# Altium PCB QSTL_LED_PCB.PcbDoc
Units mm, origin at the board's own origin, x right, y up, seen from the top; angles counter-clockwise.
Board outline 10 x 20.43 mm, 2 copper layers (Top Layer, Bottom Layer); 6 components, 3 nets, 14 pads, 132 vias.
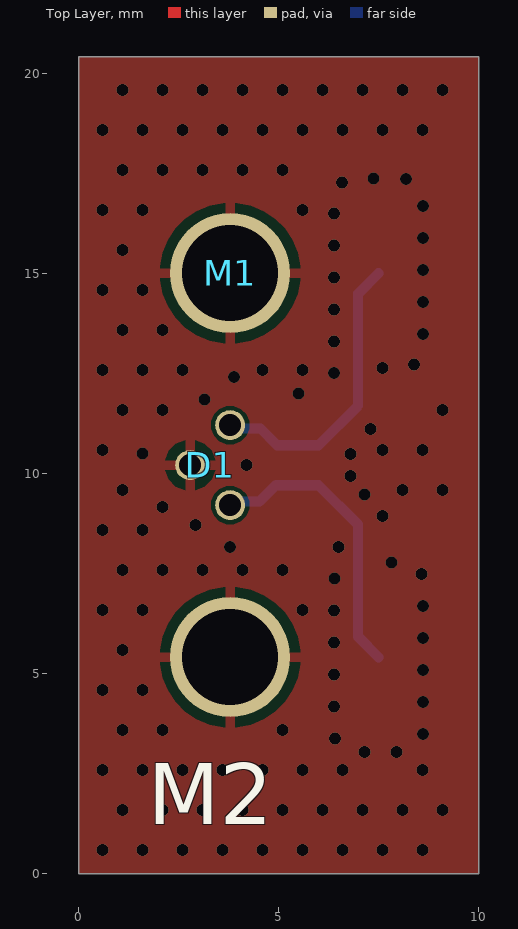
[diagram p0: Top Layer view]
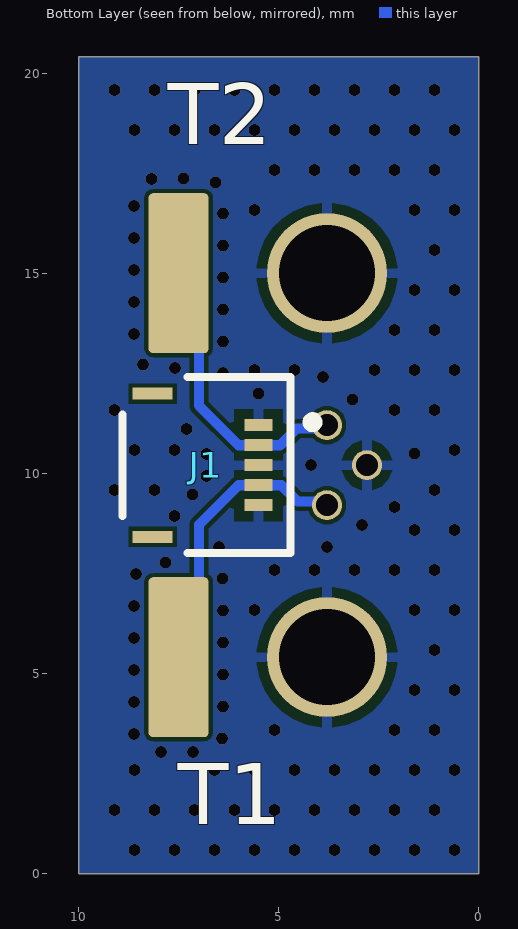
[diagram p1: Bottom Layer view, seen from below]

## Layer stack, top to bottom
Top Solder: solder mask 0.0102, Solder Resist, Dk 3.5
Top Layer: signal copper 0.0356
Dielectric 1: dielectric 0.32, FR-4, Dk 4.8
Bottom Layer: signal copper 0.0356
Bottom Solder: solder mask 0.0102, Solder Resist, Dk 3.5

## Board outline
0,0 10,0 10,20.43 0,20.43

## Design rules (kind name [scope] priority, off if disabled: settings)
Clearance "Stitching Diode Cathode" [IsStitchingVia and InNet('GND') vs (IsVia and (Not IsStitchingVia)) Or IsPad] p1: gap=0.127 ignorepadtopadclearanceinfootprint=FALSE
Clearance [All] p2: gap=0.254 ignorepadtopadclearanceinfootprint=FALSE except(0: Arc-Hole Track-Hole SMDPad-Hole THPad-Hole Via-Hole Fill-Hole Poly-Hole Region-Hole Text-Hole; 0.1: Arc-Fill Arc-Poly Arc-Region Track-Fill Track-Poly Track-Region SMDPad-Fill SMDPad-Poly SMDPad-Region THPad-Fill THPad-Poly THPad-Region Via-Fill Via-Poly Via-Region Fill-Fill Fill-Poly Fill-Region Poly-Poly Poly-Region Region-Region)
PlaneClearance [All] p1: clearance=0.2
PlaneConnect [All] p1: pad.planeconnectstyle=Relief pad.reliefexpansion=0.2 pad.reliefentries=4 pad.reliefconductorwidth=0.254 pad.reliefairgap=0.2 via.planeconnectstyle=Direct via.reliefexpansion=0.2 via.reliefentries=4 via.reliefconductorwidth=0.254 via.reliefairgap=0.2
PolygonConnect [All] p1: thpad.connectstyle=Relief thpad.reliefconductorwidth=0.254 thpad.reliefentries=4 thpad.polygonreliefangle="90 Angle" thpad.airgapwidth=0.254 smdpad.connectstyle=Relief smdpad.reliefconductorwidth=0.254 smdpad.reliefentries=4 smdpad.polygonreliefangle="90 Angle" smdpad.airgapwidth=0.254 via.connectstyle=Direct via.reliefconductorwidth=0.254 via.reliefentries=4 via.polygonreliefangle="90 Angle" via.airgapwidth=0.254
RoutingVias [All] p1: holewidth=0.711 width=1.27 viastyle="Through Hole" minholewidth=0.711 minwidth=1.27 maxholewidth=0.711 maxwidth=1.27
SolderMaskExpansion [All] p1: expansion=0.102 istentingtop=FALSE
Width [All] p1: maxlimit=0.5 minlimit=0.254 preferedwidth=0.254
28 further rules are at their usual default settings.

## Components (designator, comment, footprint, x,y, rotation, side; value= is the part's Value field where it differs from the comment)
D1 "780nm Laser Diode" D7805I 3.79,10.215 r270 top locked
J1 "503480-0540" FP-503480-0540-MFG 6.8,10.215 r270 bottom locked
M1 "M2 Hole" M2 3.79,15.015 r0 top locked
M2 "M2 Hole" M2 3.79,5.415 r0 top locked
T1 "Test point pad" Test_Point_Pin 7.5,5.415 r180 bottom
T2 "Test point pad" Test_Point_Pin 7.5,15.015 r180 bottom

## Footprints (in the part's own frame and the unit in brackets; to place one, negate y for a bottom-side part, rotate by r counter-clockwise, add the part's x,y. Pads: shape width x height; smd on the part's side, far side on the other; paste and mask are expansions set on the pad)
D7805I [mm]
  round 0.75 hole 0.55: 1(-1,0) 2(0,-1) 3(1,0)
FP-503480-0540-MFG [mm]
  rect 0.3x0.7 smd paste+0 mask+0: 1(-1,1.3) 2(-0.5,1.3) 3(0,1.3) 4(0.5,1.3) 5(1,1.3)
  rect 0.3x1 smd paste+0 mask+0: 6(-1.79,-1.35) 7(1.79,-1.35)
  silkscreen extent -2.2,-2.1 2.2,2.77, body extent -2.1,-1.96 2.1,1.64, height 2.07
M2 [mm]
  round 3 hole 2.4: 1(0,0)
Test_Point_Pin [mm]
  rrect15% 1.5x4 smd: 1(0,0)

## Part data
D1: library part D7805I
J1: library part CMP-00257-52963780-1, "503480-0540 Connector FFC/FPC SKT 5 Position 0.5mm Solder Right Angle Surface Mount T/R", Current Rating=500mA, Flammability Rating="UL94 V-0", Manufacturer Lifecycle Status=ACTIVE, Max Operating Temperature=85°C, Min Operating Temperature=-40°C, Voltage Rating=50V, Actuator Material="Glass, Nylon, Polyamide", Contact Material="Bronze, Gold, Nickel", Contact Plating=Gold, Country of Origin=KR, Halogen Free="Low Halogen", Height=2.07mm, Housing Material=Polymer, Lifecycle Status=Production, Mount="Surface Mount", NexarPartId=52963780, Number of Circuits=5, Number of Contacts=5, Number of Positions=5, Number of Rows=1, Orientation="Right Angle", Pitch=508µm, Plating=Gold, RoHS=Compliant, Termination=Solder, Wire/Cable Type=Straight
M1 M2: library part M2
T1 T2: library part Test_Point_Pin

## Via types
v1: diameter 0.3, hole 0.3, Top Layer to Bottom Layer, 80 vias
v2: diameter 0.3, hole 0.3, Top Layer to Bottom Layer, tented both sides, 47 vias
v3: diameter 0.3, hole 0.3, Top Layer to Bottom Layer, tented bottom, 5 vias

## Nets (pads, with @x,y where several pads share a name; then routed paths per layer and width w, separated by ;. In a path a pad name is that pad's centre, name@x,y a point inside that pad or via, vN(x,y) a via of type N, cw(c..) or ccw(c..) an arc to the next point about the centre after c; other vN are vias at no path point)
"Diode Anode": D1.3 J1.4 T1.1 | length 7.3
  Bottom Layer w0.254: D1.3 3.885,9.31 4.527,9.31 4.932,9.715 4.961,9.715 J1.4 6,9.715 6.989,8.726 6.989,5.926 T1.1
"Diode Cathode": D1.1 J1.2 T2.1 | length 7.4
  Bottom Layer w0.254: D1.1@3.859,11.215 D1.1 3.875,11.13 4.546,11.13 4.961,10.715 J1.2 6,10.715 6.989,11.704 6.989,14.504 T2.1
GND: D1.2 J1.1 J1.3 J1.5 M1.1 M2.1
  other v1: 0.6,0.6 1.6,0.6 2.6,0.6 3.6,0.6 4.6,0.6 5.6,0.6 6.6,0.6 7.6,0.6 8.6,0.6 1.1,1.6 2.1,1.6 3.1,1.6 4.1,1.6 5.1,1.6 6.1,1.6 7.1,1.6 8.1,1.6 9.1,1.6 0.6,2.6 1.6,2.6 2.6,2.6 3.6,2.6 4.6,2.6 5.6,2.6 6.6,2.6 8.6,2.6 1.1,3.6 2.1,3.6 5.1,3.6 0.6,4.6 1.6,4.6 1.1,5.6 0.6,6.6 1.6,6.6 5.6,6.6 1.1,7.6 2.1,7.6 3.1,7.6 4.1,7.6 5.1,7.6 0.6,8.6 1.1,9.6 0.6,10.6 1.1,11.6 0.6,12.6 1.6,12.6 2.6,12.6 4.6,12.6 5.6,12.6 1.1,13.6 2.1,13.6 0.6,14.6 1.6,14.6 1.1,15.6 0.6,16.6 1.6,16.6 5.6,16.6 1.1,17.6 2.1,17.6 3.1,17.6 4.1,17.6 5.1,17.6 0.6,18.6 1.6,18.6 2.6,18.6 3.6,18.6 4.6,18.6 5.6,18.6 6.6,18.6 7.6,18.6 8.6,18.6 1.1,19.6 2.1,19.6 3.1,19.6 4.1,19.6 5.1,19.6 6.1,19.6 7.1,19.6 8.1,19.6 9.1,19.6
  other v2: 7.144,3.049 7.944,3.049 6.416,3.379 8.609,3.494 6.384,4.179 8.616,4.294 6.384,4.979 8.616,5.094 6.384,5.779 8.616,5.894 6.384,6.579 8.616,6.694 6.399,7.378 8.567,7.492 7.821,7.781 3.79,8.175 6.495,8.173 1.6,8.6 2.917,8.726 7.6,8.95 2.1,9.166 7.153,9.484 6.8,9.939 4.193,10.215 6.8,10.497 1.6,10.511 7.3,11.121 2.1,11.6 3.146,11.857 5.5,12.005 3.884,12.415 6.384,12.515 7.595,12.649 8.391,12.732 6.384,13.305 8.616,13.5 6.384,14.105 8.616,14.3 6.384,14.905 8.616,15.1 6.384,15.705 8.616,15.9 6.384,16.505 8.616,16.7 6.583,17.28 7.376,17.381 8.183,17.372
  other v3: 8.1,9.6 9.1,9.6 7.6,10.6 8.6,10.6 9.1,11.6
pads on no net: J1.6 J1.7

## Polygon pours and split planes (outlines as drawn)
GND on Bottom Layer "GND_L02_P004" (solid, pour order 4): 0,20.43 0,0 10,0 10,20.43
GND on Top Layer "GND_L01_P005" (solid, pour order 5): 0,20.43 0,0 10,0 10,20.43
no net on Top Solder "GND_L01_P-001" (solid): 9,20.43 10,20.43 10,0 9,0
no net on Top Solder "GND_L01_P-001" (solid): 0,0 9,0 9,20.43 0,20.43
no net on Bottom Solder "GND_L01_P-001" (solid): 9.079,20.43 10,20.43 10,0 9.079,0
no net on Bottom Solder "GND_L01_P-001" (solid): 0,20.43 0,0 9.079,0 9.079,20.43

## Silkscreen, mask and mechanical layers (free items; w line width, h text height)
Top Solder:
  pour cut-out: 1.75,8.425 5.152,8.425 5.152,12.005 1.75,12.005
Bottom Solder:
  pour cut-out: 4.7,12.415 9.079,12.415 9.079,8.015 4.7,8.015
  pour cut-out: 6.3,12.415 6.3,17.5 8.75,17.5 8.75,12.415
  pour cut-out: 8.75,8.015 8.75,3 6.164,3 6.164,8.015
  pour cut-out: 2,12.03 2,8.425 4.873,8.425 4.873,12.03
Mechanical 1:
  the board outline again, w0.254